# EAGLE board LazuriteMiniDongle2 (EAGLE 7.6.0)
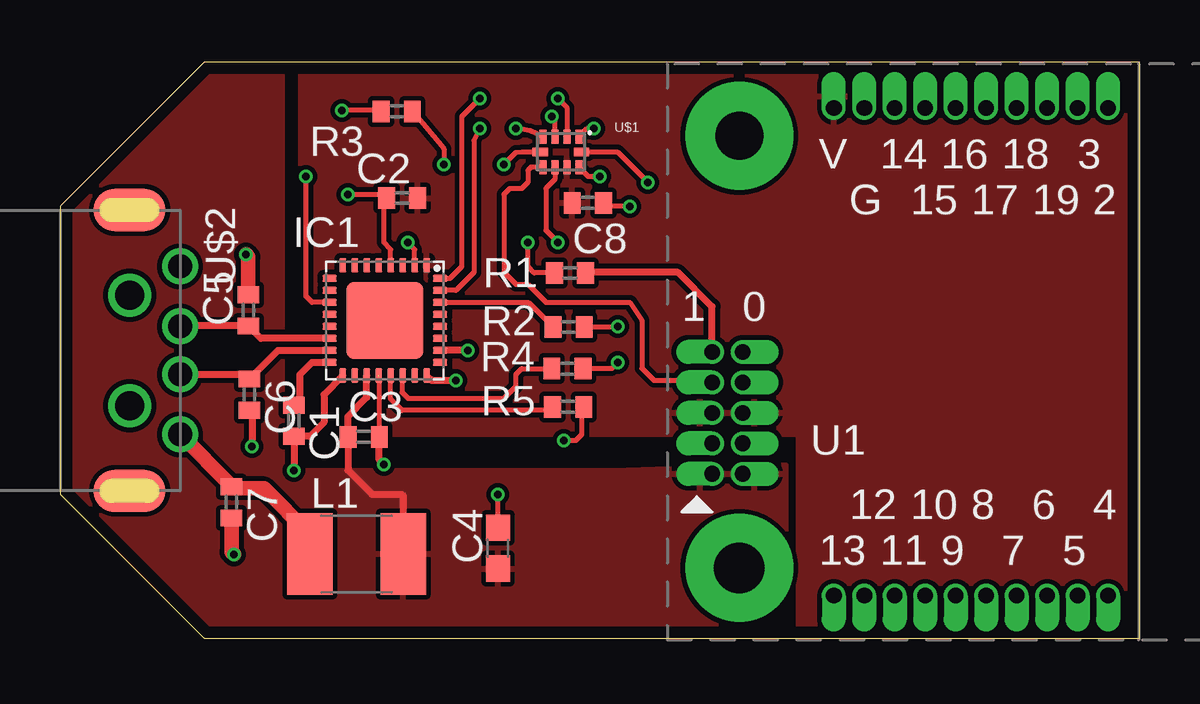
[diagram p0: board, top side]
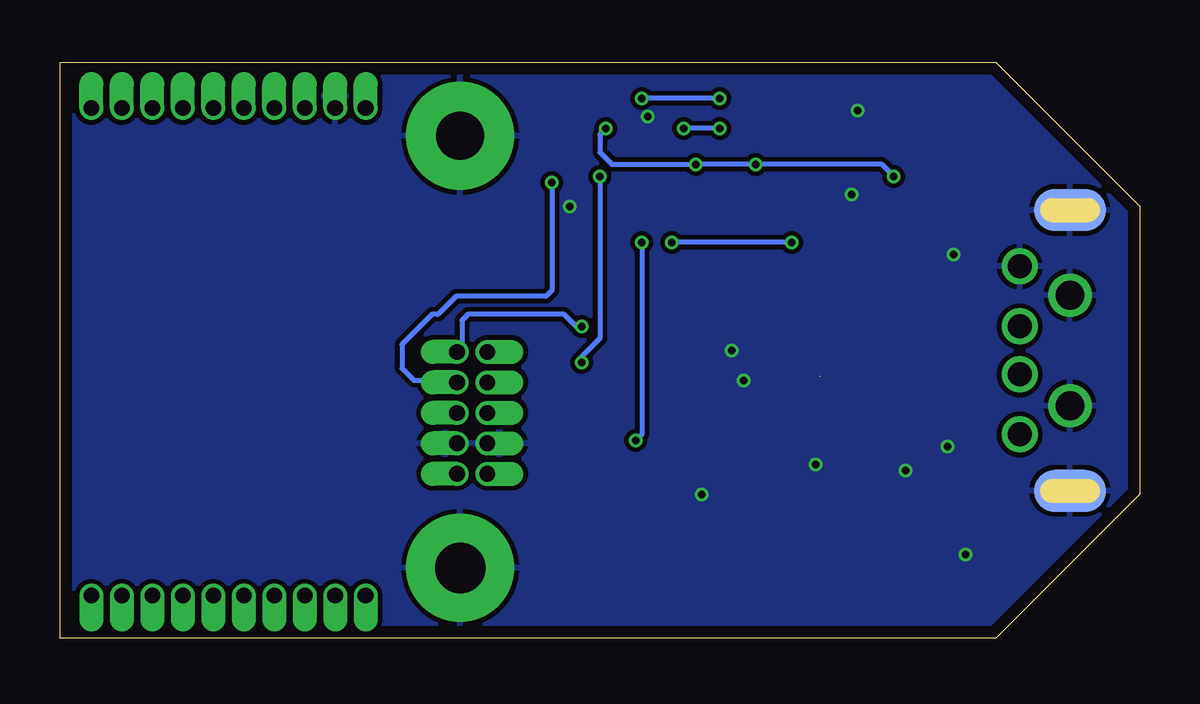
[diagram p1: board, bottom side, seen from below]

Size 45 x 24 mm. Coordinates in mm from the lower left corner, seen from the top.
Outline: 6,0 45,0 45,24 6,24 0,18 0,6 6,0
Copper layers (1*16): Top 0.018mm / dielectric 1.55mm / Bottom 0.018mm
Design rules "kpl_2_layer": minimum track width 0.2mm, minimum drill 0.3mm, track to track 0.2mm, track to pad 0.2mm, pad to pad 0.2mm, via to via 0.2mm, smd to smd 0mil, copper to edge 0.5mm, drill to drill 0.3mm, minimum pad ring 0.175mm, minimum via ring 0.125mm, stop-mask expansion 0mil, vias tented up to drill 0.45mm, thermal gap 0.2mm

## Footprints (pad centres in the part's own frame; a part is rotated, then mirrored left to right if it is on the bottom)
C0402 = smd 0.7 x 0.9: 1 -0.65,0; 2 0.65,0
C1608 = smd 1.1 x 1: 1 -0.85,0; 2 0.85,0
QFN32 = smd 0.6 x 0.3: 1 -2.3,1.75; 2 -2.3,1.25; 3 -2.3,0.75; 4 -2.3,0.25; 5 -2.3,-0.25; 6 -2.3,-0.75; 7 -2.3,-1.25; 8 -2.3,-1.75; 17 2.3,-1.75; 18 2.3,-1.25; 19 2.3,-0.75; 20 2.3,-0.25; 21 2.3,0.25; 22 2.3,0.75; 23 2.3,1.25; 24 2.3,1.75 | smd 0.3 x 0.6: 9 -1.75,-2.3; 10 -1.25,-2.3; 11 -0.75,-2.3; 12 -0.25,-2.3; 13 0.25,-2.3; 14 0.75,-2.3; 15 1.25,-2.3; 16 1.75,-2.3; 25 1.75,2.3; 26 1.25,2.3; 27 0.75,2.3; 28 0.25,2.3; 29 -0.25,2.3; 30 -0.75,2.3; 31 -1.25,2.3; 32 -1.75,2.3 | smd 3.2 x 3.2: EXP 0,0
L1812 = smd 1.9 x 3.4: 1 -1.95,0; 2 1.95,0
R0402 = smd 0.7 x 0.9: 1 -0.65,0; 2 0.65,0
LAZURITE920J = drill 0.65 pad 0.8 offset: 0 1.27,5.08; 1 0,5.08; 2 16.51,15.24; 3 15.24,15.24; 4 16.51,-5.08; 5 15.24,-5.08; 6 13.97,-5.08; 7 12.7,-5.08; 8 11.43,-5.08; 9 10.16,-5.08; 10 8.89,-5.08; 11 7.62,-5.08; 12 6.35,-5.08; 13 5.08,-5.08; 14 7.62,15.24; 15 8.89,15.24; 16 10.16,15.24; 17 11.43,15.24; 18 12.7,15.24; 19 13.97,15.24; GND_0 0,1.27; GND_1 1.27,1.27; GND_2 6.35,15.24; TEST0 1.27,3.81; TEST1N 0,3.81; VCC3V_0 0,2.54; VCC3V_1 1.27,2.54; VCC3V_2 5.08,15.24; VCC5V_0 0,0; VCC5V_1 1.27,0 | drill 2.1 pad 4.5: PAD_0 1.135,-3.92 | drill 2 pad 4.5: PAD_1 1.135,14.08
UQFN10 = smd 0.3 x 0.58: 1 -0.75,-0.635; 2 -0.25,-0.635; 3 0.25,-0.635; 4 0.75,-0.635; 6 0.75,0.635; 7 0.25,0.635; 8 -0.25,0.635; 9 -0.75,0.635 | smd 0.63 x 0.35: 5 0.86,0; 10 -0.86,0
UP2-AH-TH = drill 1: D+ -1,5; D- 1,5; G -3.5,5; VDD 3.5,5 | smd 1.75 x 3: GND$1 -5.85,2.9; GND$4 5.85,2.9 | smd 1.75 x 3 bottom: GND$2 -5.85,2.9; GND$3 5.85,2.9 | drill 1.2: GND$5 -2.3,2.9; GND$6 2.3,2.9

## Placement (x,y rotation side)
C1  0.1u  [C0402]  9.75,9.07 270 top
C2  0.1u  [C0402]  14.26,18.35 180 top
C3  0.1u  [C0402]  12.66,8.4 0 top
C4  4.7u  [C1608]  18.25,3.76 90 top
C5  47p  [C0402]  7.85,13.67 90 top
C6  47p  [C0402]  7.9,10.16 270 top
C7  0.1u  [C0402]  7.15,5.67 270 top
C8  0.1u  [C0402]  22,18.15 0 top
IC1  FT232RQ  [QFN32]  13.54,13.25 270 top
L1  500mA  [L1812]  12.36,3.52 0 top
R1  1k  [R0402]  21.26,15.23 0 top
R2  1k  [R0402]  21.2,12.98 0 top
R3  10k  [R0402]  14.04,21.96 0 top
R4  510  [R0402]  21.15,11.24 0 top
R5  510  [R0402]  21.18,9.65 0 top
U1  [LAZURITE920J]  27.18,6.86 0 top
U$1  TI-TS5A23159  [UQFN10]  20.88,20.27 180 top
U$2  USB-TYPE-A  [UP2-AH-TH]  0,12 270 top

## Library data of the parts
C1-C3 C5-C8 L1 R1-R5 = rcl
C4 = resistor
IC1 = ftdichip; MPN: FT232RQ; OC_FARNELL: 1146033; OC_NEWARK: 91K9919
U1 = lazurite
U$1 U$2 = lz-shield

## Nets
D+: C5.1 IC1.14 U$2.D+
D-: C6.1 IC1.15 U$2.D-
GND: C1.2 C2.2 C3.2 C4.2 C5.2 C6.2 C7.2 C8.2 IC1.4 IC1.17 IC1.20 IC1.24 IC1.26 R3.1 U1.GND_0 U1.GND_1 U1.GND_2 U1.PAD_0 U1.PAD_1 U$1.3 U$2.G U$2.GND$1 U$2.GND$2 U$2.GND$3 U$2.GND$4 U$2.GND$5 U$2.GND$6
N$1: C1.1 IC1.16
N$3: IC1.32 U$1.2
N$5: IC1.2 R1.1
N$6: IC1.30 R2.1
N$7: IC1.21 R5.1
N$8: IC1.22 R4.1
N$9: IC1.31 U$1.4
PROGB: IC1.11 R3.2 U$1.1 U$1.5
RXD: R2.2 U1.0
TEST0: U1.TEST0 U$1.10
TEST1N: U1.TEST1N U$1.6
TXD: R1.2 U1.1
U_TEST0: R4.2 U$1.9
U_TEST1N: R5.2 U$1.7
VBUS: C7.1 L1.1 U$2.VDD
VCC5V: C3.1 C4.1 IC1.19 L1.2 U1.VCC5V_0 U1.VCC5V_1
VDD: C2.1 C8.1 IC1.1 U1.VCC3V_0 U1.VCC3V_1 U1.VCC3V_2 U$1.8

## Tracks (layer width: path | path; a pad name or v marks a point on that pad's centre or on a via)
D+
  Top 0.3: IC1.14 8.37,12.5 C5.1 5.02,13.02 U$2.D+
D-
  Top 0.3: U$2.D- 7.71,11 C6.1 9.09,12 IC1.15
GND  (via drill 0.3)  (3 unrouted)
  Top 0.2: R3.1 13.35,22 v11.75,22 | v12,18.5 13.46,18.5 C2.2 13.5,18.24 13.5,16.5 13.79,16.21 IC1.4 | C4.2 v18.25,6 | U$1.3 20.63,21.62 v20.5,21.75 | v23.75,18 22.8,18 C8.2 | 13.31,10.93 C3.2
  Top 0.3: IC1.17 11,10.16 11,9 10.42,8.42 C1.2 v9.75,7 | v13.5,7.25 13.31,7.44 C3.2 | IC1.24 15.49,10.75 v16.5,10.75 | v17,12 IC1.26 | C6.2 8,9.41 v8,8
  Top 0.6: C7.2 7.15,3.6 v7.25,3.5 | C5.2 7.85,15.9 v7.75,16
  pour Bottom: 0,18 0,6 6,0 45,0 45,24 6,24
N$1
  Top 0.3: C1.1 10,9.97 10,11 10.5,11.5 IC1.16
N$3  (via drill 0.3)
  Top 0.2: IC1.32 16.25,15 16.75,15.5 16.75,21.75 v17.5,22.5 | v20.75,22.5 21.13,22.12 U$1.2
  Bottom 0.2: v17.5,22.5 v20.75,22.5
N$5  (via drill 0.3)
  Top 0.2: IC1.2 14.79,16.21 v14.5,16.5 | R1.1 19.77,15.23 19.5,15.5 v19.5,16.5
  Bottom 0.2: v14.5,16.5 v19.5,16.5
N$6
  Top 0.2: IC1.30 19.53,14 R2.1
N$7
  Top 0.2: R5.1 20.38,9.5 14.25,9.5 13.79,9.96 IC1.21
N$8
  Top 0.2: IC1.22 14.25,10.91 14.25,10.25 14.5,10 18.5,10 19,10.5 19,11 19.24,11.24 R4.1
N$9  (via drill 0.3)
  Top 0.2: v17.5,21.25 17.25,20.75 17.25,15.25 16.5,14.5 IC1.31 | U$1.4 19.59,21.16 v19,21.25
  Bottom 0.2: v17.5,21.25 v19,21.25
PROGB  (via drill 0.3)
  Top 0.2: U$1.1 21.98,21.25 v22.25,21.25 | v18.5,19.75 19,20.25 19.27,20.27 U$1.5 | R3.2 16,20.4 v16,19.75 | IC1.11 10.5,14 10.25,14.25 v10.25,19.25
  Bottom 0.2: v22.25,21.25 22.5,21 22.5,20.25 22,19.75 v18.5,19.75 v16,19.75 10.75,19.75 v10.25,19.25
RXD  (via drill 0.3)
  Top 0.2: R2.2 23.23,12.98 v23.25,13
  Bottom 0.2: v23.25,13 23.5,13 24,13.5 28,13.5 28.25,13.25 28.25,12.14 U1.0
TEST0  (via drill 0.3)
  Top 0.2: U$1.10 23.23,20.27 v24.5,19
  Bottom 0.2: v24.5,19 24.5,14.5 24.75,14.25 28.5,14.25 29.25,13.5 29.5,13.5 30.75,12.25 30.75,11.25 30.25,10.75 28.53,10.75 U1.TEST0
TEST1N
  Top 0.2: U1.TEST1N 27.1,10.75 24.75,10.75 24.25,11.25 24.25,13.25 23.75,14 20.25,14 19.5,14.75 19,14.75 18.5,15.25 18.5,18.5 18.75,18.75 19.25,18.75 19.5,19 19.5,19.5 19.64,19.64 U$1.6
TXD
  Top 0.3: U1.1 27.18,13.82 25.75,15.25 21.93,15.25 R1.2
U_TEST0  (via drill 0.3)
  Top 0.2: U$1.9 22.02,19.25 v22.5,19.25 | v23.25,11.5 22.99,11.24 R4.2
  Bottom 0.2: v22.5,19.25 22.5,12.5 23.25,11.75 v23.25,11.5
U_TEST1N  (via drill 0.3)
  Top 0.2: U$1.7 20.63,19.13 20.25,18.75 20.25,17 v20.75,16.5 | v21,8.25 21.5,8.25 21.75,8.5 21.75,9.57 R5.2
  Bottom 0.2: v20.75,16.5 20.75,8.5 v21,8.25
VBUS
  Top 0.6: L1.1 10.41,4.34 8.5,6.25 7.22,6.25 C7.1 7.15,6.35 U$2.VDD
VCC5V
  Top 0.3: IC1.19 12.79,10.04 12,9.25 C3.1 12,7 13,6 14.25,6 14.31,5.94 L1.2
  pour Top: 0,18 6,24 9.25,24 9.25,7 23,7 30.25,7.25 30.25,0 6,0 0,6
VDD
  pour Top: 30.75,8.5 30.75,0 45,0 45,24 10,24 10,8.5